# Altium PCB fun_bruh.PcbDoc
Units mil, origin at the board's own origin, x right, y up, seen from the top; angles counter-clockwise.
Board outline 1135 x 2850 mil, 2 copper layers (Top Layer, Bottom Layer); 52 components, 49 nets, 251 pads, 35 vias.
Unrouted connection lines stored in the file: 45.
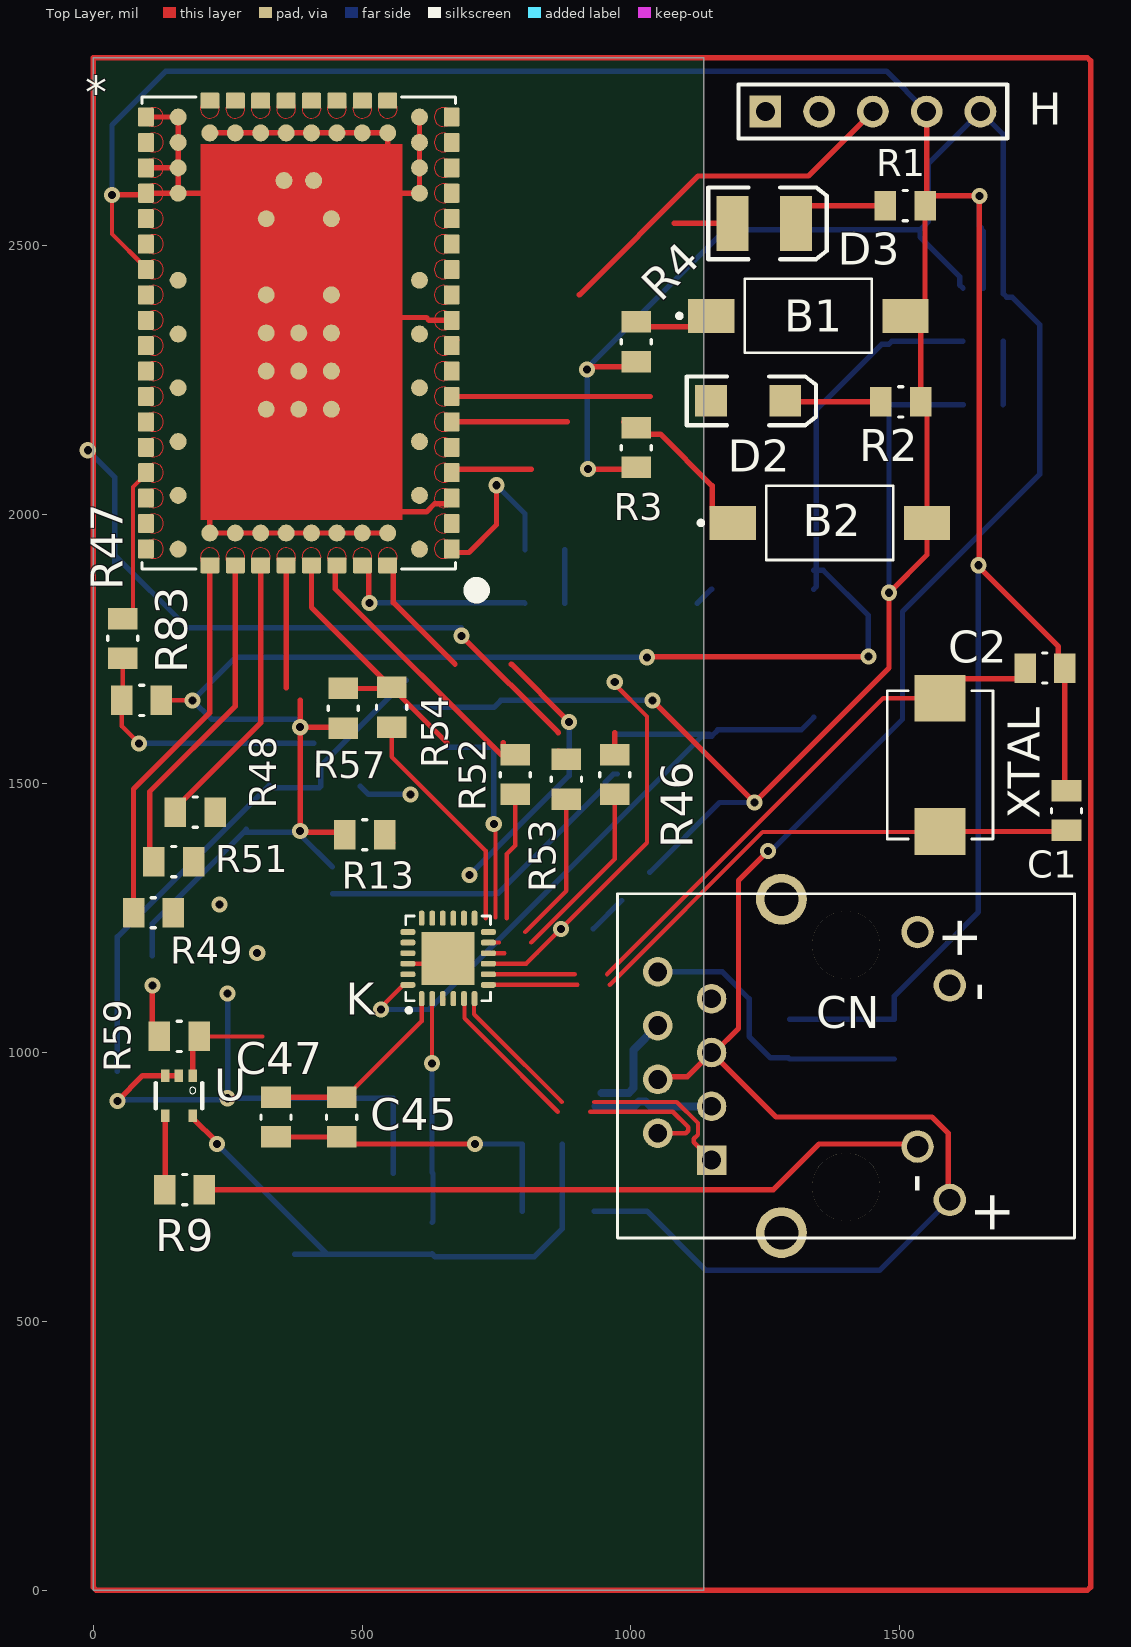
[diagram p0: Top Layer view]
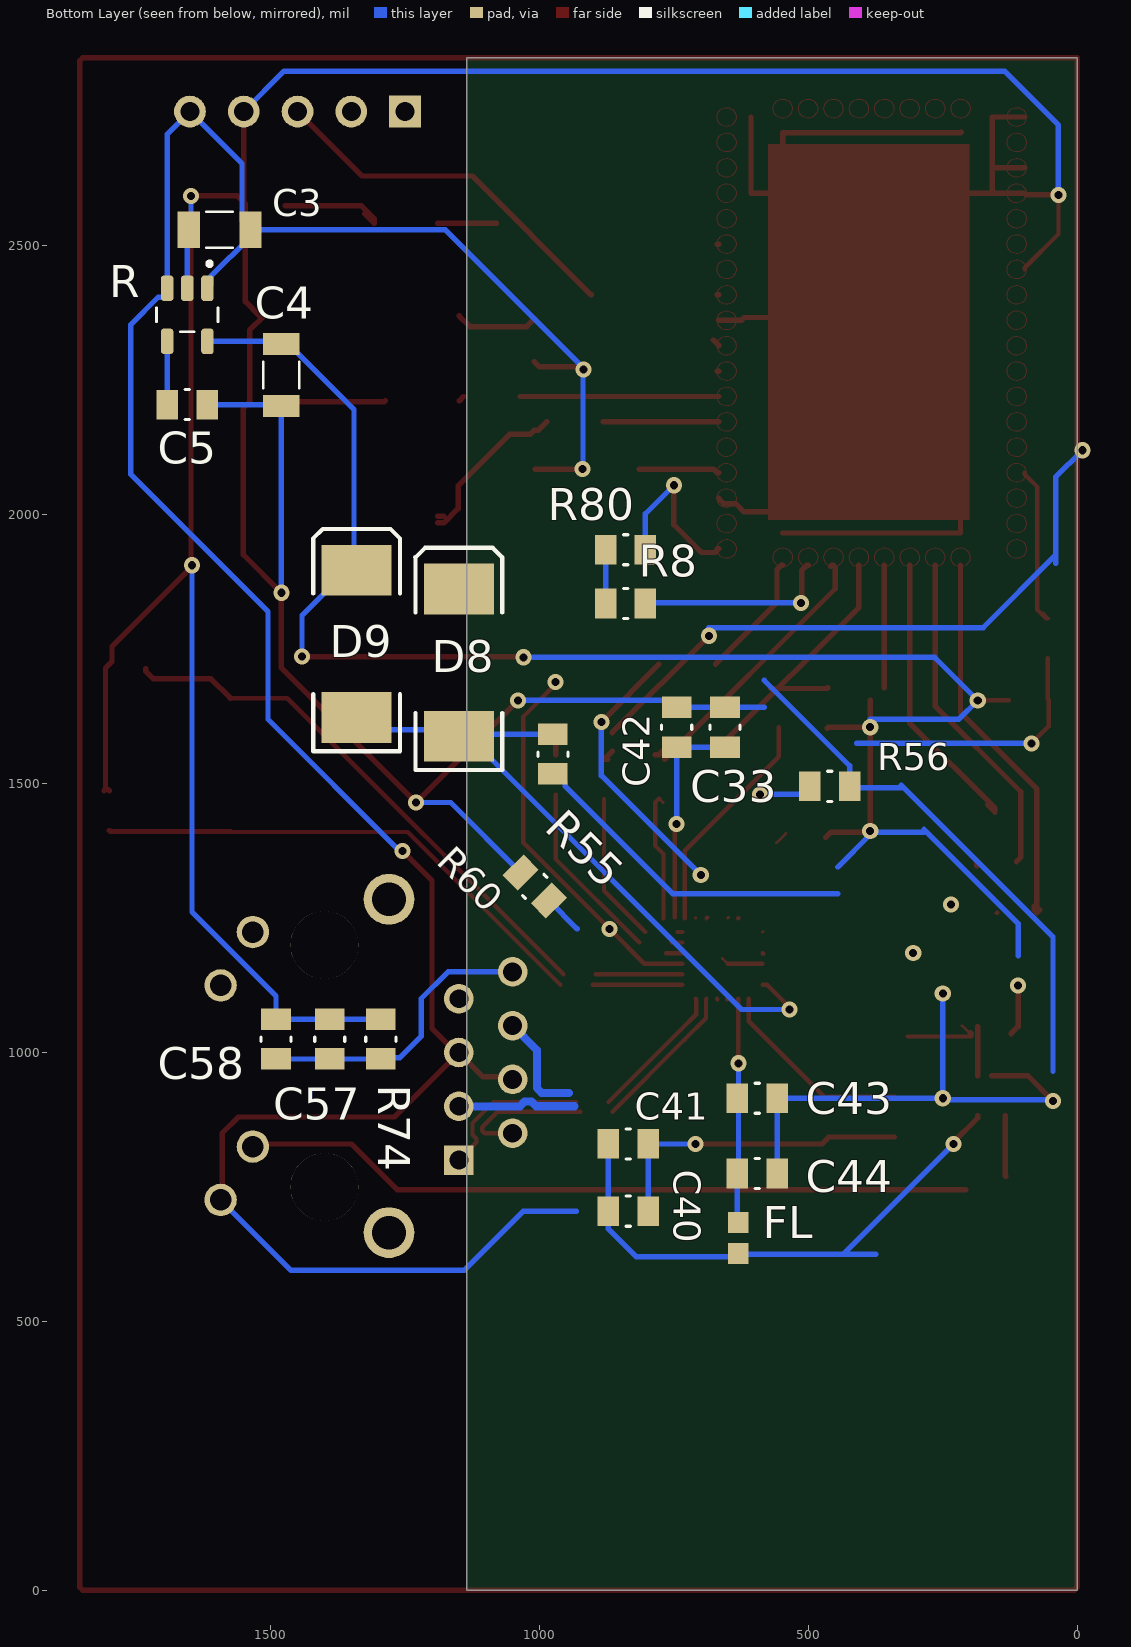
[diagram p1: Bottom Layer view, seen from below]

## Layer stack, top to bottom
Top Solder: solder mask 0.4, Solder Resist, Dk 3.5
Top Layer: signal copper 1.4
Dielectric 1: dielectric 12.6, FR-4, Dk 4.8
Bottom Layer: signal copper 1.4
Bottom Solder: solder mask 0.4, Solder Resist, Dk 3.5

## Board outline
0,2850 0,0 1135,0 1135,2850

## Design rules (kind name [scope] priority, off if disabled: settings)
Clearance [All] p1: gap=5 ignorepadtopadclearanceinfootprint=FALSE // Default=10mil
DiffPairsRouting [All] p1: maxlimit=10 minlimit=10 mostfreqgap=10 toplayer_minwidth=8 toplayer_maxwidth=15 toplayer_prefwidth=15 bottomlayer_minwidth=15 bottomlayer_maxwidth=15 bottomlayer_prefwidth=15 maxuncoupledlength=500 // DefaultMinWidth=15mil
HoleSize [All] p1: absolutevalues=TRUE maxlimit=150 minlimit=1 maxpercent=80.000 minpercent=20.000 // MaximumDefault=100mil
MinimumSolderMaskSliver [All] p1: minsoldermaskwidth=1 // Default=10mil
PolygonConnect [All] p1: connectstyle=Relief reliefconductorwidth=10 reliefentries=4 polygonreliefangle="90 Angle" airgapwidth=10
RoutingVias [All] p1: holewidth=28 width=50 viastyle="Through Hole" minholewidth=28 minwidth=50 maxholewidth=28 maxwidth=50
SilkToSolderMaskClearance [IsPad] p1: minsilkscreentomaskgap=4 clearancetoexposedcopper=TRUE // Default=10mil
SolderMaskExpansion [All] p1: expansion=4 istentingtop=FALSE
Width [All] p1: maxlimit=10 minlimit=5 preferedwidth=10 toplayer_prefwidth=8 minimp=50.000000 maximp=50.000000 favimp=50.000000 // MinWidthDefault=10mil
26 further rules are at their usual default settings.

## Classes and differential pairs
differential pair PHY_TX: +PHY_TX_P -PHY_TX_N
differential pair PHY_RX: +PHY_RX_P -PHY_RX_N

## Components (designator, comment, footprint, x,y, rotation, side; value= is the part's Value field where it differs from the comment)
* "ODIN-W262" ODIN-W262 382.37,2338.13 r90 top
B1 "push button" TECO-FSMSM 1330,2370 r0 top
B2 "push button" TECO-FSMSM 1370,1985 r0 top
C1 "22uF 10V" 0805 1810,1450 r90 top value=22uF
C2 "22uF 10V" 0805 1770,1715 r0 top value=22uF
C3 "10UF 25V" 1206 1595,2530 r0 bottom value=10uF
C4 "10UF 25V" 1206 1480,2260 r270 bottom value=10uF
C5 "10nF 50V" 0805 1655,2205 r180 bottom value=10nF
C33 "2.2uF 16V" 0805 655,1605 r270 bottom value=2.2uF
C40 "100nF 50V" 0805 835,705 r0 bottom value=100nF
C41 "100nF 50V" 0805 835,830 r0 bottom value=100nF
C42 "100nF 50V" 0805 745,1605 r270 bottom value=100nF
C43 "2.2uF 16V" 0805 595,915 r0 bottom value=2.2uF
C44 "100nF 50V" 0805 595,775 r0 bottom value=100nF
C45 "100nF 50V" 0805 462,880 r90 top value=100nF
C47 "100nF 50V" 0805 340,880 r90 top value=100nF
C57 "100nF 50V" 0805 1390,1025 r90 bottom value=100nF
C58 "100nF 50V" 0805 1490,1025 r90 bottom value=100nF
CN "CN J00-0045NL" "RJ45 J00-0045NL" 1400,975 r270 top
D2 "LED2" 3.2X1.6X1.1 1218,2212 r0 top
D3 "LED3" 3.5X2.8X1.9 1248,2542 r0 top
D8 "Diode" SMC 1150,1725 r90 bottom
D9 "Diode" SMC 1340,1760 r90 bottom
FL "BLM18PG300SN1D" BEADC1608X95N 630,655 r90 bottom
H "Header 5" HDR1X5 1250,2750 r0 top
K "KSZ8081RNAIA-TR" QFN50P400X400X90-25N 660,1175 r90 top
R "LP2992IM5-1.8" SOT95P280X145-5N 1655,2372 r270 bottom
R1 "270" 0805 1510,2575 r180 top
R2 "270" 0805 1502,2210 r180 top
R3 "1k" 0805 1010,2125 r270 top
R4 "1k" 0805 1010,2322 r270 top
R8 "JUMPER" 0805 840,1835 r180 bottom value=0
R9 "120" 0805 170,745 r180 top
R13 "1k" 0805 505,1405 r180 top
R46 "10.0" 0805 970,1517 r90 top
R47 "10.0" 0805 55,1770 r90 top
R48 "10.0" 0805 190,1447 r0 top
R49 "10.0" 0805 112,1260 r0 top
R51 "10.0" 0805 150,1355 r0 top
R52 "10.0" 0805 785,1517 r90 top
R53 "10.0" 0805 880,1508 r90 top
R54 "10.0" 0805 555,1642 r90 top
R55 "1k" 0805 975,1555 r270 bottom
R56 "1k" 0805 460,1495 r180 bottom
R57 "1k" 0805 465,1640 r90 top
R59 "1k" 0805 160,1030 r0 top
R60 "6.8k" 0805 1008.84,1308.84 r225 bottom
R74 "16m" 0805 1295,1025 r270 bottom
R80 "JUMPER" 0805 840,1935 r180 bottom value=0
R83 "4.7k" 0805 90,1655 r180 top
U "NC7SZ125" SC70-5 159.41,919.6 r180 top
XTAL "CRYSTAL 25.0000MHZ 8PF SMD" SMD-2 1575,1535 r270 top

## Footprints (in the part's own frame and the unit in brackets; to place one, negate y for a bottom-side part, rotate by r counter-clockwise, add the part's x,y. Pads: shape width x height; smd on the part's side, far side on the other; paste and mask are expansions set on the pad)
3.2X1.6X1.1 [mm]
  rect 1.5x1.5 smd: 1(-1.75,0) 2(1.75,0)
  silkscreen extent -2.9,-1.15 3.2,1.15
3.5X2.8X1.9 [mm] "SM LED; 2 C-Bend Leads; Body 3.5 x 2.8 x 1.9 mm, inc leads (LxWxH typ)"
  rect 1.5x2.6 smd: 1(-1.5,0) 2(1.5,0)
  silkscreen extent -2.65,-1.7 2.95,1.7
0805 [mil]
  rect 40x55 smd: 1(-37,0) 2(37,0)
  silkscreen extent -4,-28 4,28
1206 [mm]
  rect 1.05x1.72 smd: 1(-1.46,0) 2(1.46,0)
  silkscreen extent -0.62,-0.85 0.62,0.85
BEADC1608X95N [mm]
  rect 1x0.97 smd: 1(-0.735,0) 2(0.735,0)
HDR1X5 [mm] "Connector; Header; 5 Position"
  rect 1.5x1.5 hole 0.9: 1(0,0)
  round 1.5 hole 0.9: 2(2.54,0) 3(5.08,0) 4(7.62,0) 5(10.16,0)
  silkscreen extent -1.27,-1.27 11.43,1.27
ODIN-W262 [mm]
  round 0.8 smd: 1(6.6,-5.7) 2(7.8,-5.7) 3(9,-5.7) 4(10.2,-5.7) 5(9.45,-4.2) 6(9.45,-3) 7(9.45,-1.8) 8(9.45,-0.6) 9(9.45,0.6) 10(9.45,1.8) 11(9.45,3) 12(9.45,4.2) 13(10.2,5.7) 14(9,5.7) 15(7.8,5.7) 16(6.6,5.7) 17(-9.45,4.2) 18(-9.45,3) 19(-9.45,1.8) 20(-9.45,0.6) 21(-9.45,-0.6) 22(-9.45,-1.8) 23(-9.45,-3) 24(-9.45,-4.2) 25(-3.6,-1.54) 26(-1.8,-1.54) 27(0,-1.54) 28(1.8,-1.54) 29(5.4,-1.54) 30(7.2,-0.7) 31(-3.6,0) 32(-1.8,0) 33(0,0) 34(-3.6,1.54) 35(-1.8,1.54) 36(0,1.54) 37(1.8,1.54) 38(5.4,1.54) 39(7.2,0.7) TP1(2.49,-5.7) TP2(2.49,5.7) TP3(-0.05,-5.7) TP4(-0.05,5.7) TP5(-2.59,-5.7) TP6(-2.59,5.7) TP7(-5.13,-5.7) TP8(-5.13,5.7) TP9(-7.67,-5.7) TP10(-7.67,5.7) TP11(-10.21,-5.7) TP12(-10.21,5.7)
  rrect15% 0.9x0.75 smd paste-1 mask+0: A1(-10.2,-7.225) A2(-9,-7.225) A3(-7.8,-7.225) A4(-6.6,-7.225) A5(-5.4,-7.225) A6(-4.2,-7.225) A7(-3,-7.225) A8(-1.8,-7.225) A9(-0.6,-7.225) A10(0.6,-7.225) A11(1.8,-7.225) A12(3,-7.225) A13(4.2,-7.225) A14(5.4,-7.225) A15(6.6,-7.225) A16(7.8,-7.225) A17(9,-7.225) A18(10.2,-7.225) C1(10.2,7.225) C2(9,7.225) C3(7.8,7.225) C4(6.6,7.225) C5(5.4,7.225) C6(4.2,7.225) C7(3,7.225) C8(1.8,7.225) C9(0.6,7.225) C10(-0.6,7.225) C11(-1.8,7.225) C12(-3,7.225) C13(-4.2,7.225) C14(-5.4,7.225) C15(-6.6,7.225) C16(-7.8,7.225) C17(-9,7.225) C18(-10.2,7.225)
  rrect15% 0.75x0.9 smd paste-1 mask+0: B1(10.975,-4.2) B2(10.975,-3) B3(10.975,-1.8) B4(10.975,-0.6) B5(10.975,0.6) B6(10.975,1.8) B7(10.975,3) B8(10.975,4.2) D1(-10.975,4.2) D2(-10.975,3) D3(-10.975,1.8) D4(-10.975,0.6) D5(-10.975,-0.6) D6(-10.975,-1.8) D7(-10.975,-3) D8(-10.975,-4.2)
  Top Layer circle w0: c10.2,6.85 r0.45
  Top Layer circle w0: c7.8,6.85 r0.45
  Top Layer circle w0: c1.8,-6.85 r0.45
  Top Layer circle w0: c4.2,-6.85 r0.45
  Top Layer circle w0: c-1.8,-6.85 r0.45
  Top Layer circle w0: c-4.2,-6.85 r0.45
  Top Layer circle w0: c-3,-6.85 r0.45
  Top Layer circle w0: c10.6,4.2 r0.45
  Top Layer circle w0: c10.6,3 r0.45
  Top Layer circle w0: c10.6,1.8 r0.45
  Top Layer circle w0: c10.6,0.6 r0.45
  Top Layer circle w0: c10.6,-0.6 r0.45
  Top Layer circle w0: c10.6,-1.8 r0.45
  Top Layer circle w0: c10.6,-3 r0.45
  Top Layer circle w0: c10.6,-4.2 r0.45
  Top Layer circle w0: c4.2,6.85 r0.45
  Top Layer circle w0: c5.4,6.85 r0.45
  Top Layer circle w0: c9,6.85 r0.45
  Top Layer circle w0: c-10.2,6.85 r0.45
  Top Layer circle w0: c-9,6.85 r0.45
  Top Layer circle w0: c-7.8,6.85 r0.45
  Top Layer circle w0: c-4.2,6.85 r0.45
  Top Layer circle w0: c-3,6.85 r0.45
  Top Layer circle w0: c-1.8,6.85 r0.45
  Top Layer circle w0: c-0.6,6.85 r0.45
  Top Layer circle w0: c0.6,6.85 r0.45
  Top Layer circle w0: c1.8,6.85 r0.45
  Top Layer circle w0: c-5.4,-6.85 r0.45
  Top Layer circle w0: c-9,-6.85 r0.45
  Top Layer circle w0: c10.2,-6.85 r0.45
  Top Layer circle w0: c9,-6.85 r0.45
  Top Layer circle w0: c7.8,-6.85 r0.45
  Top Layer circle w0: c6.6,-6.85 r0.45
  Top Layer circle w0: c5.4,-6.85 r0.45
  Top Layer circle w0: c3,-6.85 r0.45
  Top Layer circle w0: c-6.6,-6.85 r0.45
  Top Layer lines w0: -5.414,7.3 cw(c-5.4,6.85) -5.4,6.4 cw(c-5.4,6.85) -5.667,6.488 cw(c-5.4,6.85) -5.414,7.3 ; 2.968,7.299 cw(c3,6.85) 3.131,7.281 cw(c3,6.85) 3,6.4 cw(c3,6.85) 2.968,7.299 ; 6.53,7.295 cw(c6.6,6.85) 6.6,6.4 cw(c6.6,6.85) 6.53,7.295 ; -6.731,7.281 cw(c-6.6,6.85) -6.6,6.4 cw(c-6.6,6.85) -6.731,7.281 ; -11.042,4.286 cw(c-10.6,4.2) -10.6,3.75 cw(c-10.6,4.2) -11.05,4.2 cw(c-10.6,4.2) -11.047,4.251 cw(c-10.6,4.2) -11.042,4.286 ; -11.05,3 cw(c-10.6,3) -10.6,2.55 cw(c-10.6,3) -11.05,3 ; -11.05,1.8 cw(c-10.6,1.8) -10.6,1.35 cw(c-10.6,1.8) -11.05,1.8 ; -11.05,0.6 cw(c-10.6,0.6) -10.6,0.15 cw(c-10.6,0.6) -11.05,0.6 ; -11.05,-0.6 ccw(c-10.6,-0.6) -10.6,-1.05 ccw(c-10.6,-0.6) -11.05,-0.6 ; -11.031,-1.931 ccw(c-10.6,-1.8) -10.6,-2.25 ccw(c-10.6,-1.8) -11.031,-1.931 ; -11.042,-3.086 cw(c-10.6,-3) -10.6,-3.45 cw(c-10.6,-3) -11.034,-3.118 cw(c-10.6,-3) -11.042,-3.086 ; -11.031,-4.331 ccw(c-10.6,-4.2) -10.6,-4.65 ccw(c-10.6,-4.2) -11.031,-4.331 ; 0.6,-6.4 cw(c0.6,-6.85) 0.6,-7.3 cw(c0.6,-6.85) 0.6,-6.4 ; -8.067,-6.488 cw(c-7.8,-6.85) -7.8,-7.3 cw(c-7.8,-6.85) -8.067,-6.488 ; -10.069,-7.281 ccw(c-10.2,-6.85) -10.27,-7.295 ccw(c-10.2,-6.85) -10.2,-7.3 ccw(c-10.2,-6.85) -10.114,-7.292 ccw(c-10.2,-6.85) -10.069,-7.281 ; -0.514,-7.292 ccw(c-0.6,-6.85) -0.6,-7.3 ccw(c-0.6,-6.85) -0.514,-7.292
  silkscreen extent -12.4,-8.65 11.15,7.4, body extent -11.15,-7.4 11.15,7.4, height 4.8
QFN50P400X400X90-25N [mm]
  rrect70% 0.71x0.27 smd: 1(-1.9,1.25) 2(-1.9,0.75) 3(-1.9,0.25) 4(-1.9,-0.25) 5(-1.9,-0.75) 6(-1.9,-1.25) 13(1.9,-1.25) 14(1.9,-0.75) 15(1.9,-0.25) 16(1.9,0.25) 17(1.9,0.75) 18(1.9,1.25)
  rrect70% 0.27x0.71 smd: 7(-1.25,-1.9) 8(-0.75,-1.9) 9(-0.25,-1.9) 10(0.25,-1.9) 11(0.75,-1.9) 12(1.25,-1.9) 19(1.25,1.9) 20(0.75,1.9) 21(0.25,1.9) 22(-0.25,1.9) 23(-0.75,1.9) 24(-1.25,1.9)
  rect 2.5x2.5 smd paste-2: 25(0,0)
  silkscreen extent -2.55,-2 2,2
"RJ45 J00-0045NL" [mm]
  rect 1.398x1.398 hole 0.89: 1(4.445,-6.35)
  round 1.398 hole 0.89: 2(3.175,-8.89) 3(1.905,-6.35) 4(0.635,-8.89) 5(-0.635,-6.35) 6(-1.905,-8.89) 7(-3.175,-6.35) 8(-4.445,-8.89)
  round 1.53 hole 1.02: 9(6.325,4.9) 10(3.81,3.38) 11(-3.81,4.9) 12(-6.325,3.38)
  round 3.2 hole 3.2 unplated: None(-5.715,0) None(5.715,0)
  round 2.4 hole 1.6: S1(-7.875,-3.05) S2(7.875,-3.05)
  silkscreen extent -8.13,-10.8 8.13,10.8
SC70-5 [mm]
  rect 0.4x0.6 smd: 1(-0.65,-0.95) 2(0,-0.95) 3(0.65,-0.95) 4(0.65,0.95) 5(-0.65,0.95)
  silkscreen extent -1.1,-0.6 1.1,0.6
SMC [mm] "DO-214-AB/SMC; 2 C-Bend Leads; Body 7.9 x 5.9 mm, inc. leads (LxW)"
  rect 2.4x3.3 smd: 1(-3.475,0) 2(3.475,0)
  silkscreen extent -5.07,-2.05 5.43,2.05
SMD-2 [mm]
  rect 2.2x2.4 smd: 1(-3.15,0) 2(3.15,0)
  silkscreen extent -3.5,-2.5 3.5,2.5
SOT95P280X145-5N [mm]
  rrect50% 1.21x0.59 smd: 1(-1.255,0.95) 2(-1.255,0) 3(-1.255,-0.95) 4(1.255,-0.95) 5(1.255,0.95)
  silkscreen extent -2.51,-1.45 0.8,1.45
TECO-FSMSM [mm]
  rect 2.19x1.6 smd: 1(-4.59,0) 2(4.59,0)
  silkscreen extent -6.2,-1.75 3,1.75

## Part data
B1 B2: library part Teco-FSMSM
C1 C2: library part "CAP 22uF 10V", "CAP CER 2.2UF 10V X5R 0805", Operating Temperature="-55°C ~ 85°C", Package=0805, Rating=10V, Temperature Coefficient=X5R, Tolerance=20%
C3 C4: library part "CAP 10uF 25V", "CAP CER 10UF 25V X5R 1206", Operating Temperature="-55°C ~ 85°C", Package=1206, Rating=25V, Temperature Coefficient=X5R, Tolerance=10%
C5: library part "CAP 10nF 50V", "CAP CER 10000PF 50V X7R 0805", Operating Temperature="-55°C ~ 125°C", Package=0805, Rating=50V, Temperature Coefficient=X7R, Tolerance=10%
C33 C43: library part "CAP 2.2uF 16V", "CAP CER 2.2UF 16V X7R 0805", Operating Temperature="-55°C ~ 125°C", Package=0805, Rating=16V, Temperature Coefficient=X7R, Tolerance=10%
C40 C41 C42 C44 C45 C47 C57 C58: library part "CAP 100nF 50V", "CAP CER 0.1UF 50V X7R 0805", Package=0805, Rating=50V, Tolerance=10%
CN: library part "CN MAGJACK", "CN MAGJACK 1PORT 100 BASE-TX", Package=None, Supplier Part Number 1=673-J00-0045NL, Digikey=553-1619-5-ND, Digikey Link=https://www.digikey.com/product-detail/en/pulse-electronics-network/J00-0045NL/553-1619-5-ND/1036860?utm_source=snapeda&utm_medium=aggregator&utm_campaign=symbol, MF="Pulse Electronics", MP=J00-0045NL, SnapEDA_Link=https://www.snapeda.com/parts/J00-0045NL/Pulse%20Electronics%20Network/view-part/87956/?ref=snap, Supplier 1=Mouser
D2: library part "LED RED SMD", "Typical RED, GREEN, YELLOW, AMBER GaAs LED", Color=Red, Current - Test=20mA, Lens Color=Colorless, Package=1206, Voltage - Forward (Vf) (Typ)=1.7V, Lens Transparency=Clear
D3: "Typical BLUE SiC LED", DatasheetVersion=16-Apr-2002, LatestRevisionDate=17-Dec-2003, LatestRevisionNote="PCB Footprint replaced.", PackageDescription="SM LED; 2 C-Bend Leads; Body 3.5 x 2.8 x 1.9 mm, inc leads (LxWxH typ)", PackageReference=3.5X2.8X1.9, PackageVersion=16-Apr-2002, Published=8-Jun-2000, Publisher="Altium Limited"
D8 D9: "Default Diode", Code_JEDEC=DO-214-AB, LatestRevisionDate=17-Jul-2002, LatestRevisionNote="Re-released for DXP Platform.", PackageDescription="DO-214-AB/SMC; 2 C-Bend Leads; Body 7.9 x 5.9 mm, inc. leads (LxW)", PackageReference=SMC, PackageVersion=Sep-1996, Published=8-Jun-2000, Publisher="Altium Limited"
FL: "30 Ohms @ 100MHz 1 Power Line Ferrite Bead 0603 _1608 Metric_ 1A 50mOhm", Package="1608 Murata", Availability=Unavailable, MF=Murata, MP=BLM18PG300SN1D, Price=None, SnapEDA_Link=https://www.snapeda.com/parts/BLM18PG300SN1D/Murata/view-part/270173/?ref=snap
H: "Header, 5-Pin", LatestRevisionDate=17-Jul-2002, LatestRevisionNote="Re-released for DXP Platform.", Publisher="Altium Limited"
K: "1/1 Transceiver Full RMII 24-QFN _4x4_", Package="QFN-24 Microchip", Availability=Unavailable, MF=Microchip, MP=KSZ8081RNAIA-TR, Price=None, SnapEDA_Link=https://www.snapeda.com/parts/KSZ8081RNAIA-TR/Microchip/view-part/482545/?ref=snap
R: Package=None, Availability=Unavailable, MP=LP2992IM5-1.8/NOPB, Price=None
R1 R2: library part "RES 270 1/8W", "RES SMD 270 OHM 5% 1/8W 0805", Package=0805, Power (Watts)=0.125W, Tolerance=5%
R3 R4 R13 R55 R56 R57 R59: library part "RES 1k 1/8W", "RES SMD 1K OHM 5% 1/8W 0805", Package=0805, Power (Watts)=0.125W, Tolerance=5%
R8 R80: library part "RES 0 JUMPER", "RES SMD 0 OHM JUMPER GENERIC 0805", Package=0805
R9: library part "RES 120.0 1/8W", "RES SMD 120 OHM 5% 1/8W 0805", Package=0805, Power (Watts)=0.125W, Tolerance=5%
R46 R47 R48 R49 R51 R52 R53 R54: library part "RES 10.0 1/8W - 5%", "RES SMD 10.0 OHM 5% 1/8W 0805", Package=0805, Power (Watts)=0.125W, Tolerance=5%
R60: library part "RES 6.8k 1/8W", "RES SMD 6.8K OHM 5% 1/8W 0805", Package=0805, Power (Watts)=0.125W, Tolerance=5%
R74: library part "RES 16m 1/2W", "RES SMD 0.016 OHM 1% 1/2W 0805 Thick Film", Case Code (Imperial)=0805, Case Code (Metric)=2012, Manufacturer=Panasonic, Manufacturer Part Number=ERJ-6BWFR016V, Max Operating Temperature=155°C, Max Power Dissipation=500mW, Min Operating Temperature=-55°C, Package Quantity=1, Resistance=16mR, Supplier Part Number 1=P.016AQCT-ND, Temperature Coefficient=200ppm/°C, Tolerance=1%, Case/Package=0805, Category="Chip SMD Resistors", ComponentLink1Description=https://datasheet.ciiva.com/11808/0900766b8126441d-11808690.pdf?src-supplier=RSComponents, ComponentLink1URL=https://datasheet.ciiva.com/11808/0900766b8126441d-11808690.pdf?src-supplier=RSComponents, ComponentLink2Description=https://datasheet.ciiva.com/2452/aoa0000ce3-2452594.pdf?src-supplier=Digi-Key, ComponentLink2URL=https://datasheet.ciiva.com/2452/aoa0000ce3-2452594.pdf?src-supplier=Digi-Key, ComponentLink3Description=https://datasheet.ciiva.com/2452/aoa0000ce3-2452592.pdf?src-supplier=Digi-Key, ComponentLink3URL=https://datasheet.ciiva.com/2452/aoa0000ce3-2452592.pdf?src-supplier=Digi-Key, ComponentLink4Description=https://datasheet.ciiva.com/2452/aoa0000ce3-2452593.pdf?src-supplier=Digi-Key, ComponentLink4URL=https://datasheet.ciiva.com/2452/aoa0000ce3-2452593.pdf?src-supplier=Digi-Key, ComponentLink5Description=https://datasheet.ciiva.com/9192/aoa0000ce3-9192761.pdf?src-supplier=Avnet, ComponentLink5URL=https://datasheet.ciiva.com/9192/aoa0000ce3-9192761.pdf?src-supplier=Avnet, ComponentLink6Description=https://datasheet.ciiva.com/17211/aoa0000ce3-17211370.pdf?src-supplier=Avnet+Europe, ComponentLink6URL=https://datasheet.ciiva.com/17211/aoa0000ce3-17211370.pdf?src-supplier=Avnet+Europe, Composition="Thick Film", Contact Plating=Tin, Depth=1.25mm, Features="Automotive AEC-Q200", Height=0.028inch, Lead Free="Lead Free", Length=2mm, Military Standard=Not, Mount="Surface Mount", Number of Pins=2, Number of Terminations=2, Packaging="Tape and Reel", Power Rating=500mW, Pricing 1="1=0.65000, 10=0.53800, 100=0.36140, 1000=0.21148, 2500=0.20917 (USD)", Radiation Hardening=No, RoHS=Yes, Stock 1=4585, Supplier 1=Digi-Key, Termination=SMD/SMT, Width=0.049inch
R83: library part "RES 4.7k 1/8W - 5%", "RES SMD 4.7k OHM 5% 1/8W 0805", Package=0805, Power (Watts)=0.125W, Tolerance=5%
U: "Buffer, Non-Inverting 1 Element 1 Bit per Element 3-State Output SC-70-5", Package="SC-70 ON Semiconductor", Availability=Unavailable, MF="ON Semiconductor", MP=NC7SZ125, Price=None, SnapEDA_Link=https://www.snapeda.com/parts/NC7SZ125/ON%20Semiconductor/view-part/2686816/?ref=snap
XTAL: library part "XTAL 25MHZ 8PF SMD", "25MHz ±50ppm Crystal 8pF 70 Ohms 2-SMD, No Lead", Frequency=25MHz, Load Capacitance=8pF, Package="2-SMD, No Lead", Supplier Part Number 1=644-1041-1-ND, Digikey=644-1041-1-ND, Digikey Link=https://www.digikey.ca/product-detail/en/ndk-america-inc/NX5032GA-25.000000MHZ-LN-CD-1/644-1041-1-ND/1128913, ESR="70 Ohms", MF="NDK America, Inc.", MP=NX5032GA-25.000000MHZ-LN-CD-1, Price="0.95 CAD", Supplier 1=Digi-Key

## Via types
v1: diameter 30, hole 15, Top Layer to Bottom Layer, 35 vias

## Nets (pads, with @x,y where several pads share a name; then routed paths per layer and width w, separated by ;. In a path a pad name is that pad's centre, name@x,y a point inside that pad or via, vN(x,y) a via of type N, cw(c..) or ccw(c..) an arc to the next point about the centre after c; other vN are vias at no path point)
1v8: C4.1 D9.2 R13.2 R55.2 R57.1 R59.1 R83.1 R.5 | length 4067.7
  Top Layer w8: R83.1 v1(185,1655)
  Top Layer w10: v1(110,1125) 110,1048 R59.1@123,1035 ; v1(385,1605) 463,1605 R57.1 ; 385,1655 v1(385,1411.88) 386.88,1410 458,1410 R13.2@468,1400 ; v1(1030,1735) 1030.79,1735.79 1440.79,1735.79 v1(1441.58,1736.58)
  Bottom Layer w10: 110,1180 110,1240 285,1415 ; 285,1410 384.38,1410 385,1409.38 385,1405 445,1345 ; 385,1620 220,1620 v1(185,1655) 265,1735 v1(1030,1735) ; 445,1295 752,1295 952.5,1495.5 952.5,1503 967.5,1518 R55.2 ; D9.2@1340,1861.81 1345,1866.81 1345,2195.67 1466.81,2317.48 C4.1 1485.11,2322.59 R.5 ; D9.2 1357.72,1896.81 1441.58,1812.95 v1(1441.58,1736.58)
3v3: *.A4 C3.1 C40.2 C41.2 CN.4 CN.5 CN.9 FL.1 H.5 R3.2 R4.2 R.1 R.3 U.5 | length 6274
  Top Layer w10: U.5 185,878.26 230,833.26 v1(230,830) ; *.A4 669.77,2078.29 676.48,2085 815,2085 ; v1(918.28,2270) 922.07,2270 927.07,2275 1000,2275 R4.2 ; v1(920,2085) R3.2@1008,2085 ; CN.4 1054.71,954.71 1104.71,954.71 CN.5 ; v1(1255,1375) 1200,1320 1200,1045 1155,1000 CN.5 ; CN.9 1590,728.9 1590,850 1560,880 1270,880 CN.5
  Bottom Layer w10: v1(230,830) 435,625 ; 375,625 628.94,625 FL.1 636.06,620 820,620 872,672 C40.2 C41.2 ; v1(920,2085) 919.14,2085.86 919.14,2269.14 v1(918.28,2270) 918.28,2273.28 1175,2530 C3.1 ; 932,705 1030,705 1140,595 1461.93,595 CN.9 ; CN.5@1145,1000 CN.5 ; v1(1255,1375) 1260.23,1375 1505,1619.77 1505,1820 1760,2075 1760,2353.81 1709.02,2404.79 1698.95,2404.79 1692.4,2411.34 R.3 1692.4,2707.6 H.5 1553.19,2653.19 1553.19,2545.67 C3.1 ; R.1 1611.48,2427.53 1611.48,2442.85 1537.52,2516.81 C3.1
BlueLED: *.A9 D3.1 | length 123.1
  Top Layer w10: *.A9 666.82,2315.25 669.45,2317.88 *.A9@676.58,2325.01 ; 1080.39,2542 D3.1
ETH_CRSDV: *.D4 R54.2 R57.2 | length 334.6
  Top Layer w10: 358.75,1678.25 358.75,1903.09 *.D4 ; R57.2@463.75,1678.25 R57.2 R54.2@570,1677
ETH_MC: K.10 R47.1 R83.2 | length 1132.6
  Top Layer w8: R47.1 55,1657 R83.2 53,1607 v1(85,1575) ; K.10 764.84,1184.84 ; 824.84,1184.84 1030,1390 1030,1625 970,1685 v1(970,1688.91)
  Bottom Layer w10: v1@95,1575 410,1575 ; v1@968.91,1690 v1(970,1688.91)
ETH_MDIO: K.11 R46.1 | length 359.6
  Top Layer w8: K.11 754.53,1204.53 ; 814.53,1204.53 970,1360 R46.1
ETH_REFCLK: *.D8 K.16 | length 757.8
  Top Layer w5: K.16@648.1,1251.86 K.16
  Top Layer w8: v1(700,1330) v1@703,1327
  Top Layer w10: *.D8 550.68,1906.05 552.87,1903.86 558.23,1898.5 558.23,1836.77 672.79,1722.21 ; 777.79,1722.21 v1(885,1615)
  Bottom Layer w10: v1(700,1330) 885,1515 v1(885,1615)
ETH_RXD0: *.D5 R52.2 | length 469.9
  Top Layer w10: *.D5 405.99,1903.09 405.99,1828.01 657.5,1576.5 ; 762.5,1576.5 762.5,1569 777.5,1554 R52.2
ETH_RXD1: *.D6 R53.2 | length 528.7
  Top Layer w10: *.D6@458.38,1903.86 456.19,1906.05 *.D6 450,1902.81 450,1862.5 767.5,1545 ; R53.2@865,1560 R53.2 R53.2@872.5,1545
ETH_TXD0: *.D1 R49.1 | length 716.5
  Top Layer w10: R49.1 70,1265 75,1270 75,1490 217.02,1632.02 217.02,1903.09 *.D1 ; R49.1@80,1265 R49.1@80,1272.5
ETH_TXD1: *.D2 R51.1 | length 620.3
  Top Layer w10: R51.1 105,1363 105,1485 264.26,1644.26 264.26,1903.09 *.D2
ETH_TXEN: *.D3 R48.1 | length 544.3
  Top Layer w10: R48.1@166.86,1460.86 R48.1 153,1454.5 311.5,1613 311.5,1903.09 *.D3
GND: *.1 *.2 *.3 *.4 *.5 *.6 *.7 *.8 *.9 *.10 *.11 *.12 *.13 *.14 *.15 *.16 *.17 *.18 *.19 *.20 *.21 *.22 *.23 *.24 *.25 *.26 *.27 *.28 *.29 *.30 *.31 *.32 *.33 *.34 *.35 *.36 *.37 *.38 *.39 *.A3 *.A10 *.C1 *.C3 *.C4 *.C7 B1.2 B2.2 C1.2 C2.2 C3.2 C4.2 C5.2 C33.1 C40.1 C41.1 C42.1 C43.1 C44.1 C45.1 C47.1 C57.2 C58.2 H.4 K.22 K.25 R1.1 R2.1 R56.2 R60.1 R74.1 R.2 U.2 U.3 | length 11943.9
  Top Layer w5: K.25@650.16,1165.16 K.25
  Top Layer w8: v1(35,2595) 35,2522.12 95.73,2461.39 97.92,2459.2 *.C7 ; K.22 K.25@650.16,1165.16
  Top Layer w10: v1(35,2595) 94.94,2595 95.18,2595.24 *.C4 130.4,2597.98 *.16 ; v1(45,910) 92,957 U.3 U.2 ; *.C3 130.4,2645.22 *.15 ; *.C1 130.4,2739.71 *.13 *.14 *.15 ; 215,2005 217.02,2002.98 *.17 *.18 *.19 *.20 *.21 *.22 *.23 *.24 ; *.12@215.8,2711.4 *.12 *.11 *.10 *.9 *.8 *.7 *.6 *.5 547.72,2595 ; 220,2600 217.98,2597.98 *.16 ; C47.1 C45.1 475,830 v1(710,830) ; 560,2000 565.42,2005.42 619.52,2005.42 634.64,2020.55 637.79,2020.55 657.06,2020.55 666.82,2030.31 *.A3 ; *.4 *.3 *.2 *.1 550.7,2597.98 547.72,2595 ; *.A10 634.34,2361.76 624.67,2361.76 619.52,2366.91 570,2366.91 565,2371.91 565,2380 547.72,2397.28 547.72,2595 ; v1(1040,1655) v1(1230,1465) 1480,1715 v1(1480,1855) 1550.71,1925.71 B2.2 1550.71,2198.29 R2.1 1539,2343.5 1512.5,2370 1520.5,2370 1547,2396.5 R1.1 ; R1.1@1547,2578.12 R1.1@1550,2581.12 ; H.4 R1.1@1550,2581.12 ; v1@1646.25,1903.75 1795,1755 1795,1727 C2.2 1807,1490 C1.2 ; v1@1648.12,1905.62 v1(1648.12,2593.12) 1562,2593.12 R1.1@1550,2581.12 ; C1.2@1800,1487 C1.2@1802,1489 ; *.16 *.15
  Bottom Layer w10: v1(35,2595) 35,2725 135,2825 1475,2825 H.4 ; v1(45,910) 47.5,912.5 247.5,912.5 v1(250,915) ; 45,965 45,1215 327.5,1497.5 ; v1(250,1110) v1(250,915) ; 327.5,1492.5 420.5,1492.5 R56.2 423,1533 582,1692 ; C44.1 C43.1 v1(250,915) ; 582,1642 C33.1 C42.1 758,1655 v1(1040,1655) ; v1(710,830) C41.1 C40.1 ; R60.1 1165,1465 v1(1230,1465) ; R74.1 C57.2 C58.2 1490,1105 1646.25,1261.25 v1(1646.25,1906.25) ; v1(1480,1855) C4.2 1482.48,2205 C5.2 ; v1(1648.12,2593.12) 1648.12,2537.48 1651.56,2534.04 1650,2532.48 C3.2 1655,2527.48 R.2
INV_TO_RJ45: CN.10 R9.1 | length 1363.4
  Top Layer w10: R9.1 1265,745 1350,830 1528.07,830 CN.10
KSZ_RST_OUT: D8.1 D9.1 K.24 R55.1 | length 1278.2
  Top Layer w8: v1(535,1080) 535,1084.25 576.54,1125.79 K.24
  Bottom Layer w10: v1(535,1080) 624.09,1080 1132.28,1588.19 D8.1 ; R55.1 1146.19,1592 D8.1 ; D9.1 1316.81,1600 1161.81,1600 D8.1
MAIN_RESET: *.A1 H.1 R80.2 | length 325.6
  Top Layer w10: *.A1@669.77,1936.56 *.A1 669.56,1933.82 673.38,1930 698.51,1930 750,1981.49 v1(750,2055)
  Bottom Layer w10: v1(750,2055) 803,2002 R80.2
Net*_D7: *.D7 R8.2 | length 368.1
  Top Layer w10: *.D7 502.79,1906.05 505.13,1903.71 512.56,1896.28 512.56,1837.44 v1(513.78,1836.22)
  Bottom Layer w10: v1@515,1835 v1(513.78,1836.22) 801.78,1836.22 R8.2
NetC5_1: C5.1 R.4 | length 117.8
  Bottom Layer w10: C5.1 1692.4,2205.4 R.4
NetC33_2: C33.2 C42.2 K.14 | length 410.1
  Top Layer w8: K.14@688.21,1251.12 K.14 ; v1(745,1425) 748.21,1421.79 748.21,1251.12
  Bottom Layer w10: C33.2 C42.2 v1(745,1425)
NetD2_2: D2.2 R2.2 | length 178.9
  Top Layer w10: D2.2 1288.9,2210 R2.2
NetD3_2: D3.2 R1.2 | length 210
  Top Layer w10: D3.2@1325.06,2560 D3.2 1307.06,2550.47 1331.58,2575 R1.2
NetD8_2: D8.2 R8.1 R80.1 | length 137.9
  Bottom Layer w10: R8.1 R80.1 ; D8.2@1123.19,1835 D8.2
NetK_9: K.9 R60.2 | length 239.2
  Top Layer w5: K.9 K.9@736.67,1167.03
  Top Layer w8: K.9 805.16,1165.16 v1(870,1230)
  Bottom Layer w10: 930,1230 R60.2
NetK_12: K.12 R53.1 | length 287.2
  Top Layer w8: K.12 K.12@743.46,1224.21 ; 803.46,1224.21 880,1300.75 R53.1
NetK_13: K.13 R52.1 | length 244.1
  Top Layer w5: K.13 K.13@710,1250.59 ; R52.1@770,1465 R52.1@777.5,1472.5
  Top Layer w8: 769.21,1249.8 769.21,1369.21 785,1385 785,1465 R52.1@777.5,1472.5
NetK_15: K.15 R54.1 | length 427.6
  Top Layer w8: R54.1 555,1550 729.84,1375.16 729.84,1249.8
NetK_17: K.17 R56.1 | length 99.9
  Top Layer w8: K.17@630,1250.28 K.17
  Bottom Layer w10: R56.1 512,1480 v1(590,1480)
NetK_18: K.18 R13.1 | length 24.7
  Top Layer w5: R13.1@542,1407.5 R13.1@559.5,1390
NetK_19: K.19 R48.2 | length 1.1
  Top Layer w5: K.19@584.41,1225 K.19
NetK_20: K.20 R49.2 | length 0.7
  Top Layer w8: R49.2 R49.2@149.47,1259.53
NetK_21: K.21 R51.2 | length 11.4
  Top Layer w8: v1@303.53,1183.53 v1(305,1185) ; K.21@583.88,1183.53 K.21
  Top Layer w10: R51.2@187,1347.5 R51.2
  other v1: 235,1275
NetR9_2: R9.2 U.4 | length 113.7
  Top Layer w5: U.4@133,881.38 U.4
  Top Layer w10: R9.2@133,770 133.82,770.82 U.4
PHY_LED0: K.23 R59.2 U.1 | length 239.1
  Top Layer w5: R59.2 197,1032.5 R59.2@214.5,1050
  Top Layer w8: R59.2 315,1030
  Top Layer w10: U.1 R59.2@185,1048 ; R59.2@197,1035 R59.2@199,1037
PHY_RX_N: CN.6 K.3 | length 199.7
  Top Layer w8: K.3 K.3@651,1099.35
  Bottom Layer w15: 944.93,925.08 996.19,925.08 1004.98,933.86 1004.98,1004.98 CN.6
PHY_RX_P: CN.3 K.4 | length 225.6
  Top Layer w8: K.4@669,1099.35 K.4
  Bottom Layer w15: 934.57,900.08 1006.55,900.08 1015.19,908.72 1027.61,908.72 1036.33,900 1145.7,900 1147.85,902.15 CN.3
PHY_TX_N: CN.2 K.5 | length 542.1
  Top Layer w8: K.5 690.37,1099.35 690.37,1063.74 730.11,1024 864.11,890 ; 924.11,890 1077.92,890 1106.6,861.31 1106.6,854.69 1101.92,850 CN.2
PHY_TX_P: CN.1 K.6 | length 555
  Top Layer w8: K.6 708.37,1099.35 708.37,1071.2 737.57,1042 871.57,908 ; 931.57,908 1085.37,908 1124.6,868.77 1124.6,847.23 1117,839.63 1117,833 CN.1
RedLED: *.A7 D2.1 | length 380.6
  Top Layer w10: *.A7 669.77,2220.02 1036.08,2220.02 ; D2.1@1141.08,2220.02 D2.1
RJ_45_GND: C57.1 C58.1 CN.8 R74.2 | length 558.8
  Bottom Layer w10: CN.8@1057.57,1142.43 CN.8 1170,1150 1220,1100 1220,1030 1260,990 1293,990 R74.2 C57.1 C58.1
RMII_MDC: *.C15 R47.2 | length 303.9
  Top Layer w8: R47.2@64.16,1816.16 R47.2 58.16,1807 74.16,1823 74.16,2051.57 95.73,2073.15 97.92,2075.34 *.C15
RMII_MDIO: *.C14 R46.2 | length 1238
  Top Layer w10: v1(-10,2120) -6.21,2120 v1@-1.21,2125 ; v1(685,1775) 865,1595 ; R46.2 970,1595
  Bottom Layer w10: v1(-10,2120) 40,2070 40,1910 ; 40,1925 175,1790 685,1790
SWITCH0: *.A6 B2.1 R3.1 | length 531.7
  Top Layer w10: *.A6 669.77,2172.78 881.72,2172.78 ; R3.1@986.72,2172.78 1002.5,2157 1010,2157 1017,2150 1055,2150 1151.18,2053.82 1151.18,2011.5 1177.68,1985 B2.1 ; B2.1@1177.68,1997.32 B2.1@1189.29,1997.32
SWITCH1: *.A8 B1.1 R4.1 | length 157.7
  Top Layer w10: *.A8 *.A8@669.77,2267.27 ; R4.1@1009,2365 1024,2350 1129.29,2350 B1.1
UART_RXD: *.A13 H.2 | length 3
  Top Layer w10: *.A13 *.A13@669.77,2503.49
UART_TXD: *.A11 H.3 | length 690.2
  Top Layer w10: *.A11 *.A11@669.77,2409 ; 904,2409 1125,2630 1330,2630 H.3
VDD_1v2: C45.2 C47.2 K.1 | length 371.2
  Top Layer w5: C45.2 C45.2@469.5,917
  Top Layer w8: C45.2@469.5,917 610.79,1058.29 K.1
  Top Layer w10: C47.2 C45.2
VDDA_3.3: C43.2 C44.2 FL.2 K.2 | length 418.1
  Top Layer w8: v1(630,980) 630.24,980.24 630.24,1099.96 K.2
  Bottom Layer w10: FL.2 632,685.94 C44.2 630,777 v1(630,980)
X0: C1.1 K.7 XTAL.2 | length 1124.2
  Top Layer w8: K.7 900.79,1125.79 ; 960.79,1125.79 1245,1410 1574.02,1410 XTAL.2
  Top Layer w10: XTAL.2 1797.98,1410.98 C1.1@1800,1413
X1: C2.1 K.8 XTAL.1 | length 1177
  Top Layer w5: C2.1@1732.02,1714.02 C2.1
  Top Layer w8: K.8 895.47,1145.47 ; 955.47,1145.47 1469.02,1659.02 XTAL.1
  Top Layer w10: XTAL.1 1610.98,1695 1718,1695 1732.02,1709.02 C2.1@1732.02,1714.02
pads on no net: *.A2 *.A5 *.A12 *.A14 *.A15 *.A16 *.A17 *.A18 *.B1 *.B2 *.B3 *.B4 *.B5 *.B6 *.B7 *.B8 *.C2 *.C5 *.C6 *.C8 *.C9 *.C10 *.C11 *.C12 *.C13 *.C16 *.C17 *.C18 *.TP1 *.TP2 *.TP3 *.TP4 *.TP5 *.TP6 *.TP7 *.TP8 *.TP9 *.TP10 *.TP11 *.TP12 CN.7 CN.11 CN.12 CN.None CN.S1 CN.S2
copper on no net: | length 9399.7
  Top Layer w10: 0,5.86 0,2850 1849.14,2850 1855,2844.14 1855,5.86 1849.14,0 5.86,0 0,5.86

## Other copper
Top Layer:
  rectangle net GND: 200,1990 575,2690

## Text inside footprints (layer, text, board x,y; h text height)
CN: Top Overlay "+" at 1640,745 h73.82 r270; Top Overlay "-" at 1505,775 h73.82 r270; Top Overlay "-" at 1620.72,1130.38 h73.82 r270; Top Overlay "+" at 1580,1255 h73.82 r270; Mechanical 4 "1" at 1164.07,774.03 h73.82 r270; Mechanical 4 "3" at 1164.53,874.72 h73.82 r270; Mechanical 4 "5" at 1163.97,975 h73.82 r270; Mechanical 4 "7" at 1164.39,1075.34 h73.82 r270; Mechanical 4 "8" at 1063.72,1125.66 h73.82 r270; Mechanical 4 "6" at 1063.28,1025.29 h73.82 r270; Mechanical 4 "4" at 1064.4,924.88 h73.82 r270; Mechanical 4 "2" at 1064.02,824.48 h73.82 r270; Mechanical 4 "LEFT" at 1779.36,774.12 h73.82 r270; Mechanical 4 "RIGHT" at 1778.95,1263.46 h73.82 r270; Mechanical 4 "FRONT" at 1653.39,1037.68 h73.82 r270; Mechanical 4 "9" at 1510.39,729.53 h73.82 r270; Mechanical 4 "10" at 1445.35,864.61 h73.82 r270; Mechanical 4 "11" at 1510.42,1145.37 h73.82 r270; Mechanical 4 "12" at 1455.21,1280.23 h73.82 r270; Mechanical 4 "1" at 1164.07,774.03 h73.82 r270; Mechanical 4 "3" at 1164.53,874.72 h73.82 r270; Mechanical 4 "5" at 1163.97,975 h73.82 r270; Mechanical 4 "7" at 1164.39,1075.34 h73.82 r270; Mechanical 4 "8" at 1063.72,1125.66 h73.82 r270; Mechanical 4 "6" at 1063.28,1025.29 h73.82 r270; Mechanical 4 "4" at 1064.4,924.88 h73.82 r270; Mechanical 4 "2" at 1064.02,824.48 h73.82 r270; Mechanical 4 "LEFT" at 1779.36,774.12 h73.82 r270; Mechanical 4 "RIGHT" at 1778.95,1263.46 h73.82 r270; Mechanical 4 "FRONT" at 1653.39,1037.68 h73.82 r270; Mechanical 4 "9" at 1510.39,729.53 h73.82 r270; Mechanical 4 "10" at 1445.35,864.61 h73.82 r270; Mechanical 4 "11" at 1510.42,1145.37 h73.82 r270; Mechanical 4 "12" at 1455.21,1280.23 h73.82 r270